# Altium PCB 00Key.PcbDoc (part 1 of 4)
Units mm, origin at the board's own origin, x right, y up, seen from the top; angles counter-clockwise.
Board outline 304.8 x 170.81 mm, 2 copper layers (F.Cu, B.Cu); 268 components, 236 nets, 1532 pads, 61 vias.
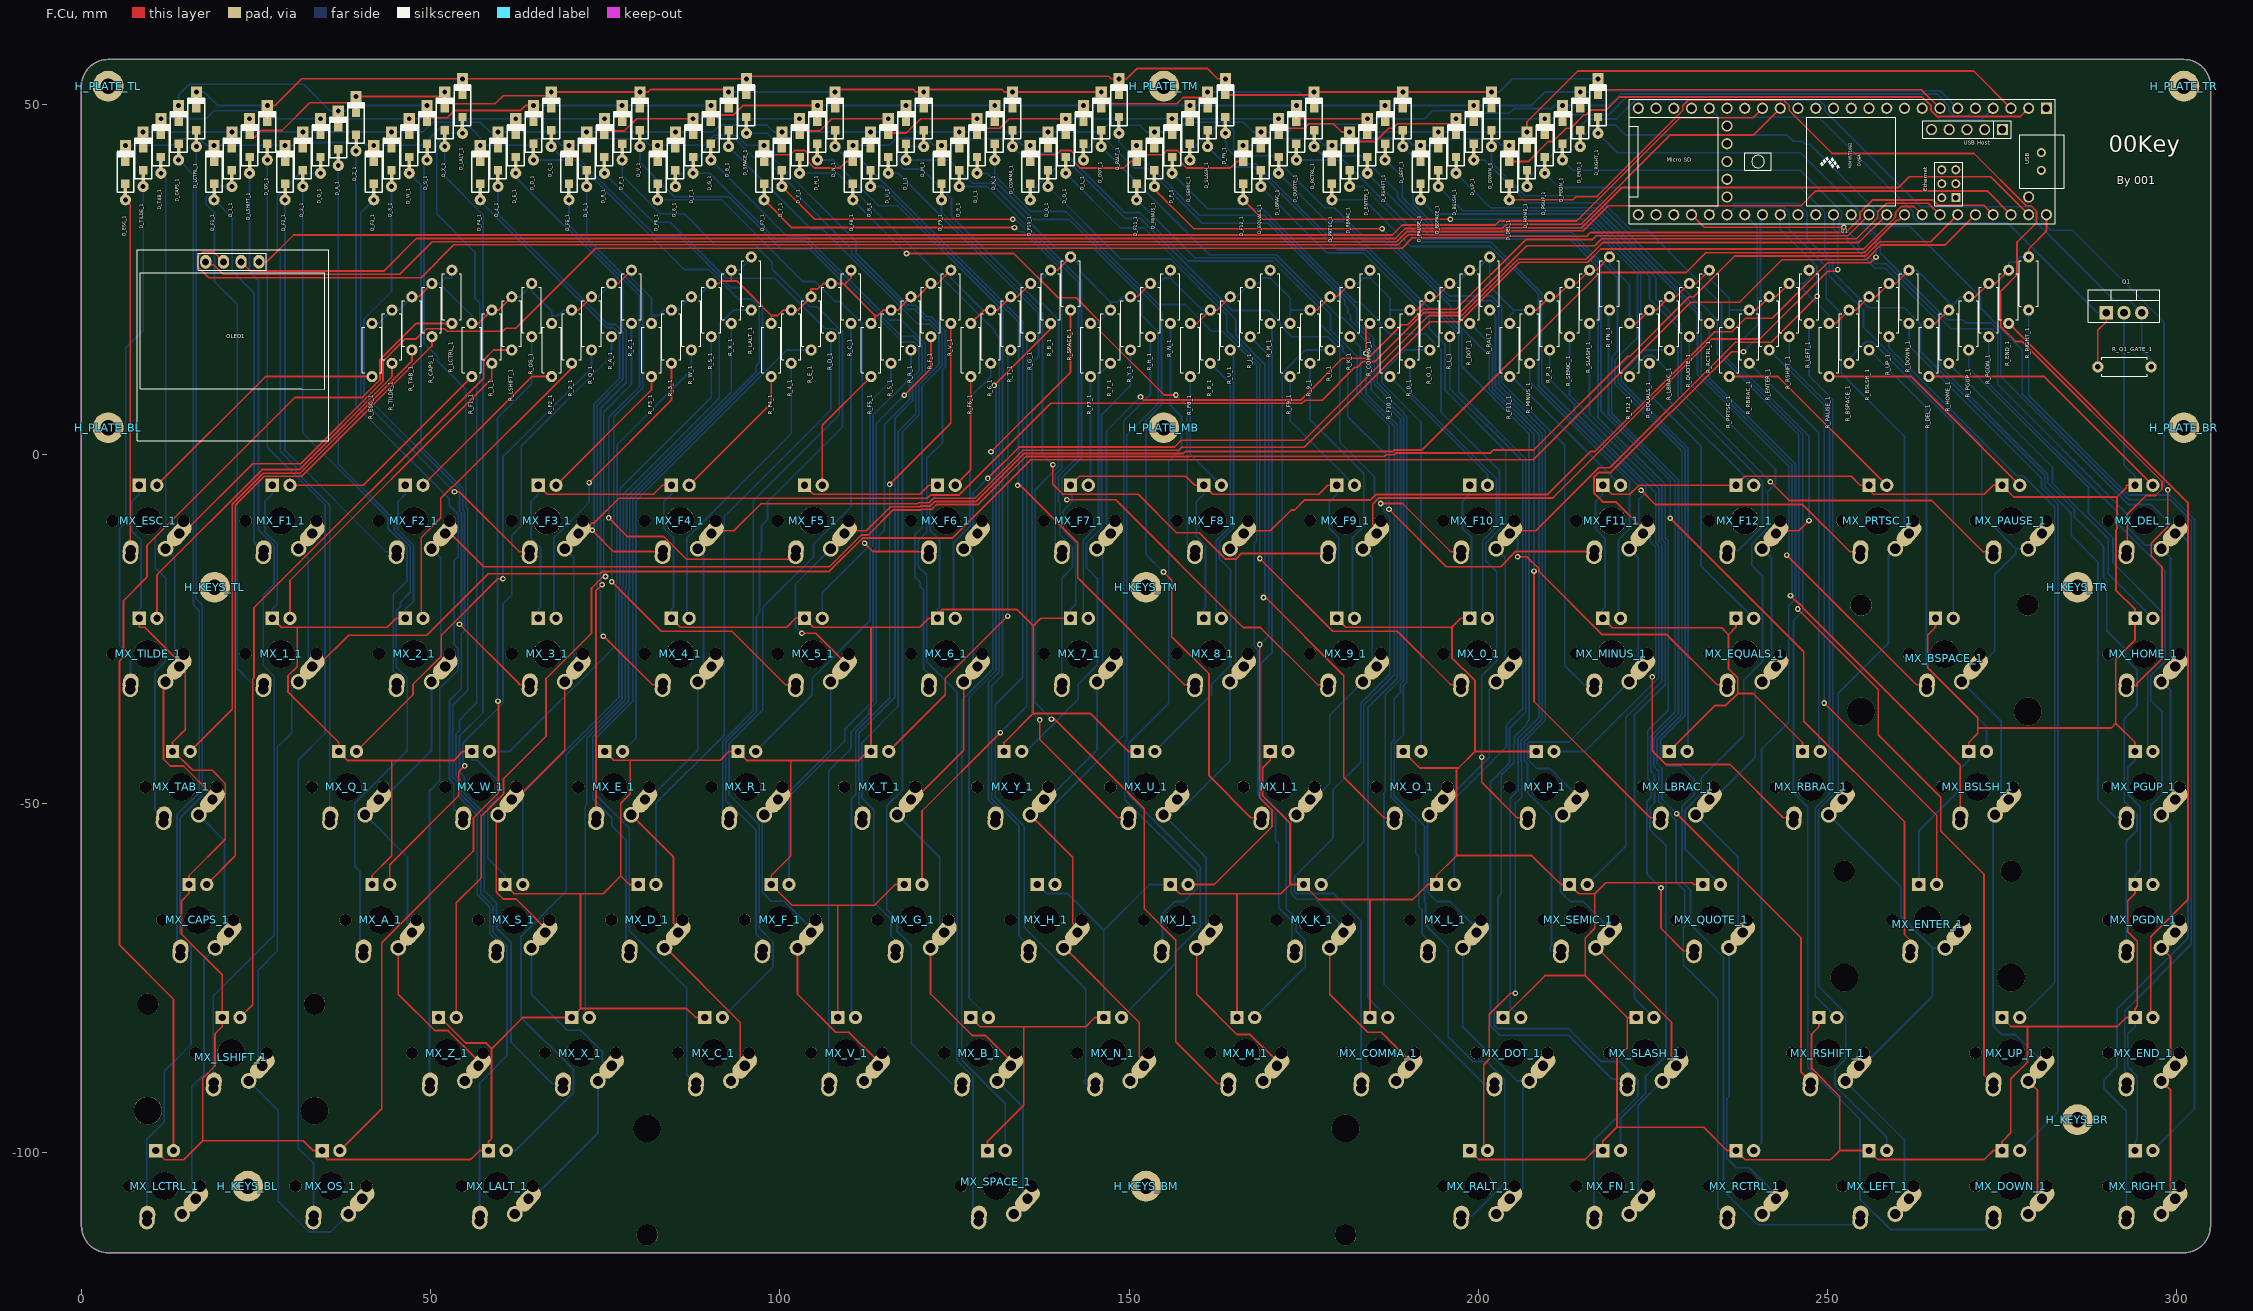
[diagram p0: F.Cu view]
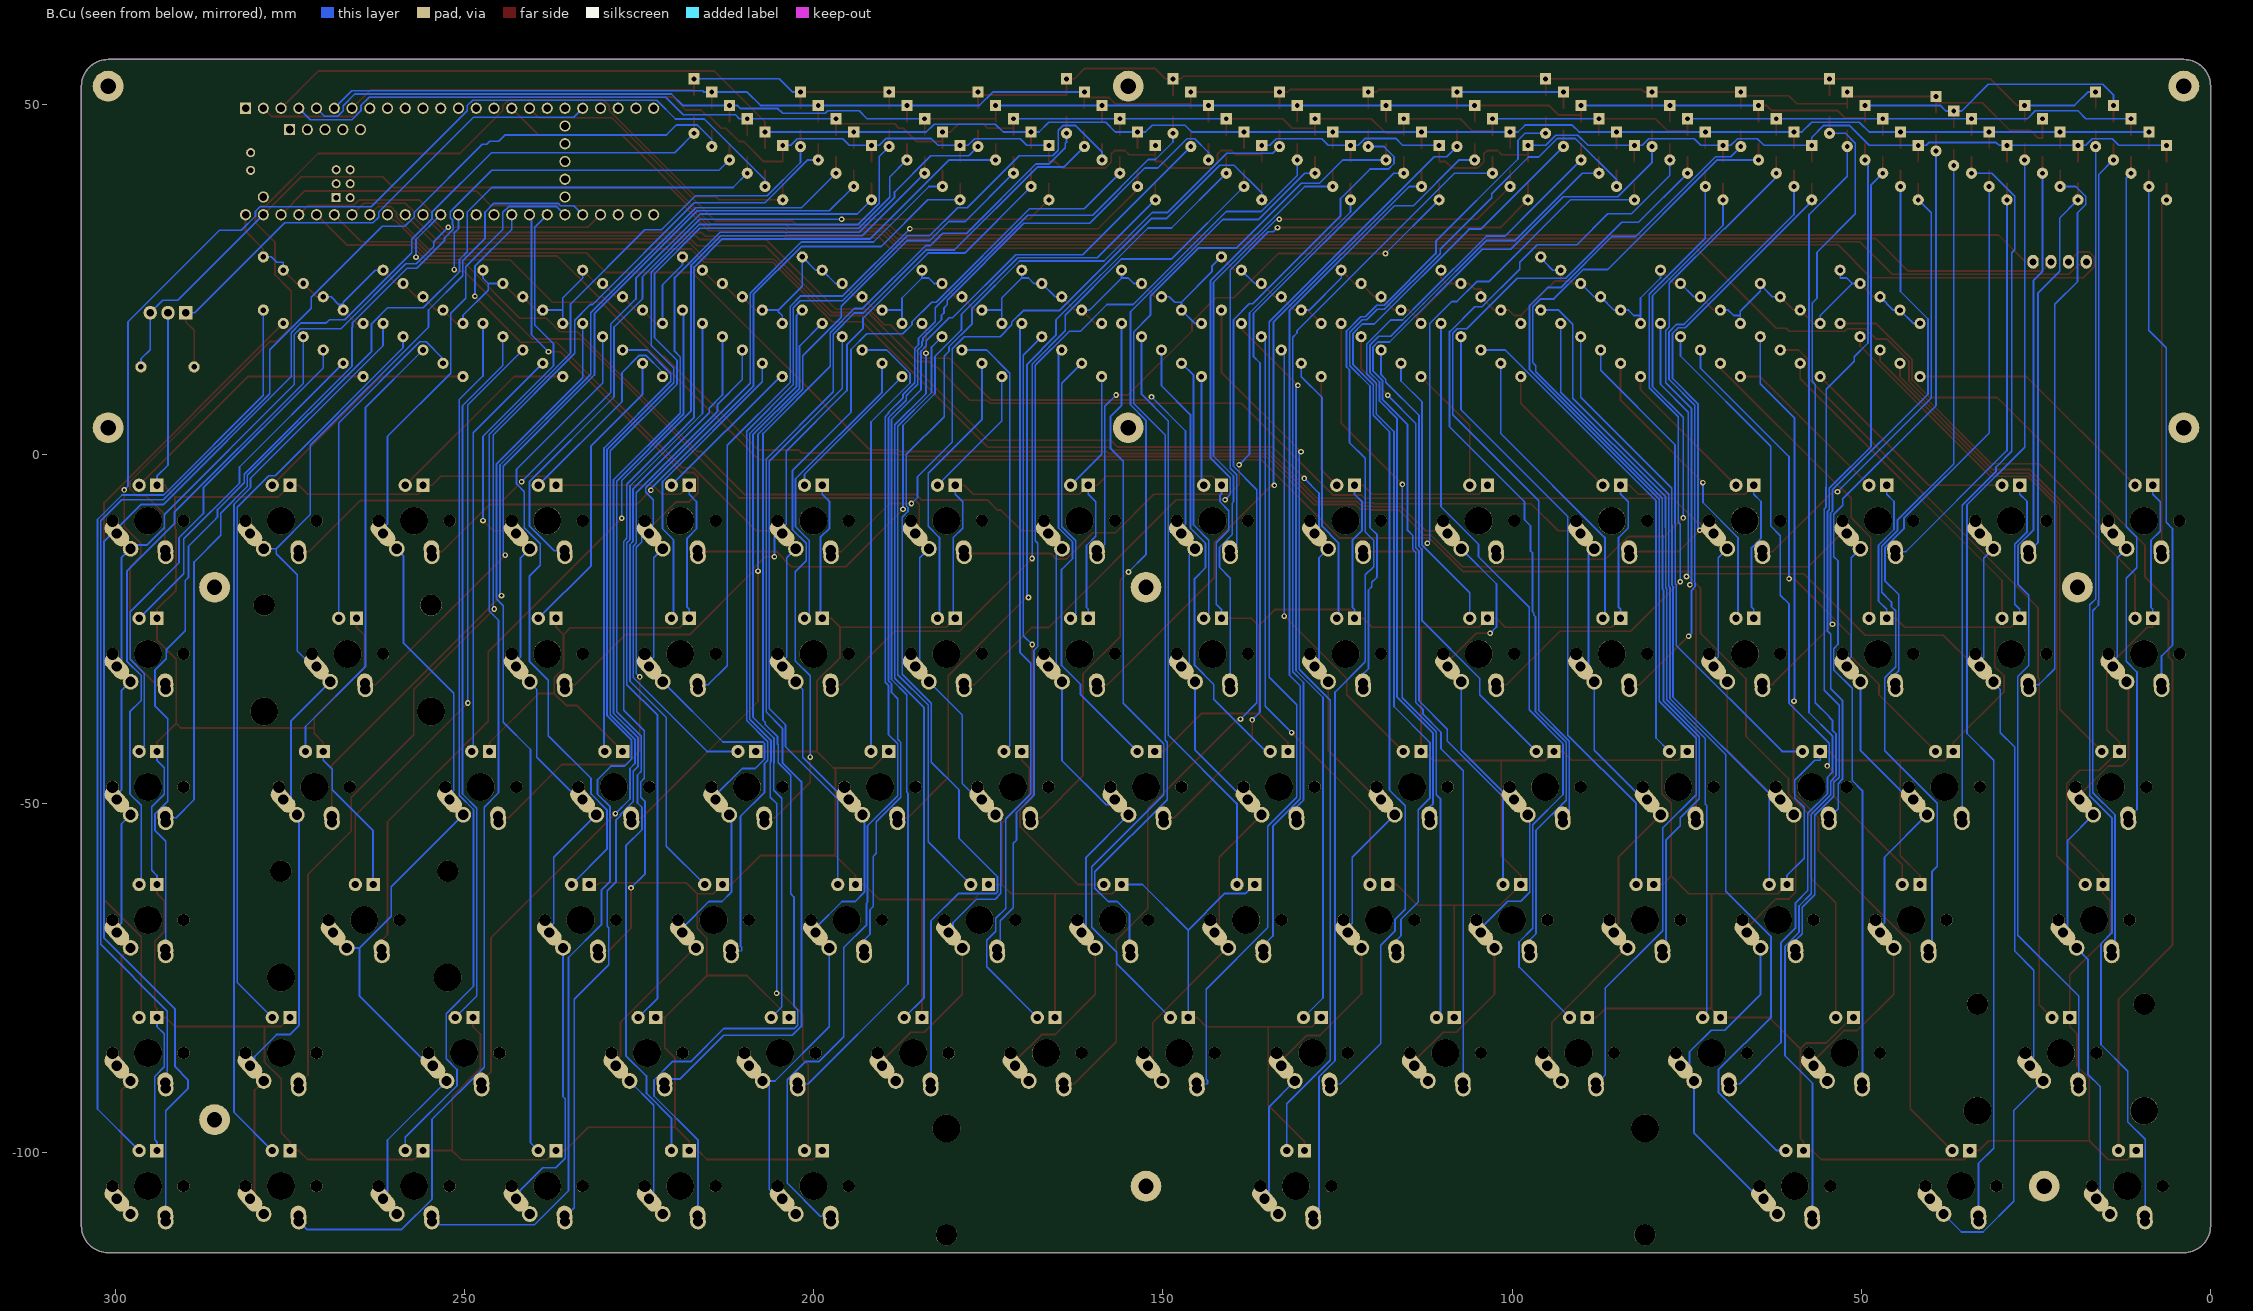
[diagram p1: B.Cu view, seen from below]

## Layer stack, top to bottom
F.Mask: solder mask 0.0102, Solder Resist, Dk 3.5
F.Cu: signal copper 0.0356
Dielectric 1: dielectric 0.32, FR-4, Dk 4.8
B.Cu: signal copper 0.0356
B.Mask: solder mask 0.0102, Solder Resist, Dk 3.5

## Board outline
0,52.705 0,-110.49 ccw(c3.81,-110.49) 3.81,-114.3 300.99,-114.3 ccw(c300.99,-110.49) 304.8,-110.49 304.8,52.705 ccw(c300.99,52.705) 3.81,56.515 ccw(c3.81,52.705) 0,52.705

## Design rules (kind name [scope] priority, off if disabled: settings)
Clearance "Clearence 0.2_NetClass" [InNetClass('Default')] p1: gap=0.2 ignorepadtopadclearanceinfootprint=FALSE
HoleSize "Hole Size (Default)" [All] p1: absolutevalues=TRUE maxlimit=10 minlimit=0.3 maxpercent=80.000 minpercent=20.000
MinimumSolderMaskSliver [All] p1: minsoldermaskwidth=0
PolygonConnect [All] p1: connectstyle=Direct reliefconductorwidth=0.254 reliefentries=4 polygonreliefangle="90 Angle" airgapwidth=0.254
RoutingVias [All] p1: holewidth=0.711 width=1.27 viastyle="Through Hole" minholewidth=0.711 minwidth=1.27 maxholewidth=0.711 maxwidth=1.27
SilkToSilkClearance [All] p1: silktosilkclearance=0
SilkToSolderMaskClearance [IsPad] p1: minsilkscreentomaskgap=0 clearancetoexposedcopper=TRUE
SolderMaskExpansion [All] p1: expansion=0.102 istentingtop=FALSE
Width [All] p1: maxlimit=10 minlimit=0.2 preferedwidth=0.25 minimp=50.000000 maximp=50.000000 favimp=50.000000
26 further rules are at their usual default settings.

## Classes and differential pairs
net class Default: 3.3V 5V col0 col1 col2 col3 col4 col5 col6 col7 col8 col9 col10 col11 col12 col13 col14 col15 GND LEDGND LEDPWM Net-(D_0_1-Pad2) Net-(D_1_1-Pad2) Net-(D_2_1-Pad2) Net-(D_3_1-Pad2) Net-(D_4_1-Pad2) Net-(D_5_1-Pad2) Net-(D_6_1-Pad2) Net-(D_7_1-Pad2) Net-(D_8_1-Pad2) Net-(D_9_1-Pad2) Net-(D_A_1-Pad2) Net-(D_B_1-Pad2) Net-(D_BSLSH_1-Pad2) Net-(D_BSPACE_1-Pad2) Net-(D_C_1-Pad2) Net-(D_CAPS_1-Pad2) Net-(D_COMMA_1-Pad2) Net-(D_D_1-Pad2) Net-(D_DEL_1-Pad2) Net-(D_DOT_1-Pad2) Net-(D_DOWN_1-Pad2) Net-(D_E_1-Pad2) Net-(D_END_1-Pad2) Net-(D_ENTER_1-Pad2) Net-(D_EQUALS_1-Pad2) Net-(D_ESC_1-Pad2) Net-(D_F1_1-Pad2) Net-(D_F2_1-Pad2) Net-(D_F3_1-Pad2) Net-(D_F4_1-Pad2) Net-(D_F5_1-Pad2) Net-(D_F6_1-Pad2) Net-(D_F7_1-Pad2) Net-(D_F8_1-Pad2) Net-(D_F9_1-Pad2) Net-(D_F10_1-Pad2) Net-(D_F11_1-Pad2) Net-(D_F12_1-Pad2) Net-(D_F_1-Pad2) Net-(D_FN_1-Pad2) Net-(D_G_1-Pad2) Net-(D_H_1-Pad2) Net-(D_HOME_1-Pad2) Net-(D_I_1-Pad2) Net-(D_J_1-Pad2) Net-(D_K_1-Pad2) Net-(D_L_1-Pad2) Net-(D_LALT_1-Pad2) Net-(D_LBRAC_1-Pad2) Net-(D_LCTRL_1-Pad2) Net-(D_LEFT_1-Pad2) Net-(D_LSHIFT_1-Pad2) Net-(D_M_1-Pad2) Net-(D_MINUS_1-Pad2) Net-(D_N_1-Pad2) Net-(D_O_1-Pad2) Net-(D_OS_1-Pad2) Net-(D_P_1-Pad2) Net-(D_PAUSE_1-Pad2) Net-(D_PGDN_1-Pad2) Net-(D_PGUP_1-Pad2) Net-(D_PRTSC_1-Pad2) Net-(D_Q_1-Pad2) Net-(D_QUOTE_1-Pad2) Net-(D_R_1-Pad2) Net-(D_RALT_1-Pad2) Net-(D_RBRAC_1-Pad2) Net-(D_RCTRL_1-Pad2) Net-(D_RIGHT_1-Pad2) Net-(D_RSHIFT_1-Pad2) Net-(D_S_1-Pad2) Net-(D_SEMIC_1-Pad2) Net-(D_SLASH_1-Pad2) Net-(D_SPACE_1-Pad2) Net-(D_T_1-Pad2) Net-(D_TAB_1-Pad2) Net-(D_TILDE_1-Pad2) Net-(D_U_1-Pad2) Net-(D_UP_1-Pad2) Net-(D_V_1-Pad2) Net-(D_W_1-Pad2) Net-(D_X_1-Pad2) Net-(D_Y_1-Pad2) Net-(D_Z_1-Pad2) Net-(MX_0_1-Pad3) Net-(MX_1_1-Pad3) Net-(MX_2_1-Pad3) Net-(MX_3_1-Pad3) Net-(MX_4_1-Pad3) Net-(MX_5_1-Pad3) Net-(MX_6_1-Pad3) Net-(MX_7_1-Pad3) Net-(MX_8_1-Pad3) Net-(MX_9_1-Pad3) Net-(MX_A_1-Pad3) Net-(MX_B_1-Pad3) Net-(MX_BSLSH_1-Pad3) Net-(MX_BSPACE_1-Pad3) Net-(MX_C_1-Pad3) Net-(MX_CAPS_1-Pad3) Net-(MX_COMMA_1-Pad3) Net-(MX_D_1-Pad3) Net-(MX_DEL_1-Pad3) Net-(MX_DOT_1-Pad3) Net-(MX_DOWN_1-Pad3) Net-(MX_E_1-Pad3) Net-(MX_END_1-Pad3) Net-(MX_ENTER_1-Pad3) Net-(MX_EQUALS_1-Pad3) Net-(MX_ESC_1-Pad3) Net-(MX_F1_1-Pad3) Net-(MX_F2_1-Pad3) Net-(MX_F3_1-Pad3) Net-(MX_F4_1-Pad3) Net-(MX_F5_1-Pad3) Net-(MX_F6_1-Pad3) Net-(MX_F7_1-Pad3) Net-(MX_F8_1-Pad3) Net-(MX_F9_1-Pad3) Net-(MX_F10_1-Pad3) Net-(MX_F11_1-Pad3) Net-(MX_F12_1-Pad3) Net-(MX_F_1-Pad3) Net-(MX_FN_1-Pad3) Net-(MX_G_1-Pad3) Net-(MX_H_1-Pad3) Net-(MX_HOME_1-Pad3) Net-(MX_I_1-Pad3) Net-(MX_J_1-Pad3) Net-(MX_K_1-Pad3) Net-(MX_L_1-Pad3) Net-(MX_LALT_1-Pad3) Net-(MX_LBRAC_1-Pad3) Net-(MX_LCTRL_1-Pad3) Net-(MX_LEFT_1-Pad3) Net-(MX_LSHIFT_1-Pad3) Net-(MX_M_1-Pad3) Net-(MX_MINUS_1-Pad3) Net-(MX_N_1-Pad3) Net-(MX_O_1-Pad3) Net-(MX_OS_1-Pad3) Net-(MX_P_1-Pad3) Net-(MX_PAUSE_1-Pad3) Net-(MX_PGDN_1-Pad3) Net-(MX_PGUP_1-Pad3) Net-(MX_PRTSC_1-Pad3) Net-(MX_Q_1-Pad3) Net-(MX_QUOTE_1-Pad3) Net-(MX_R_1-Pad3) Net-(MX_RALT_1-Pad3) Net-(MX_RBRAC_1-Pad3) Net-(MX_RCTRL_1-Pad3) Net-(MX_RIGHT_1-Pad3) Net-(MX_RSHIFT_1-Pad3) Net-(MX_S_1-Pad3) Net-(MX_SEMIC_1-Pad3) Net-(MX_SLASH_1-Pad3) Net-(MX_SPACE_1-Pad3) Net-(MX_T_1-Pad3) Net-(MX_TAB_1-Pad3) Net-(MX_TILDE_1-Pad3) Net-(MX_U_1-Pad3) Net-(MX_UP_1-Pad3) Net-(MX_V_1-Pad3) Net-(MX_W_1-Pad3) Net-(MX_X_1-Pad3) Net-(MX_Y_1-Pad3) Net-(MX_Z_1-Pad3) Net-(U1-Pad1) Net-(U1-Pad8) Net-(U1-Pad9) Net-(U1-Pad10) Net-(U1-Pad11) Net-(U1-Pad12) Net-(U1-Pad13) Net-(U1-Pad14) Net-(U1-Pad15) Net-(U1-Pad18) Net-(U1-Pad19) Net-(U1-Pad21) Net-(U1-Pad22) Net-(U1-Pad23) Net-(U1-Pad24) Net-(U1-Pad25) Net-(U1-Pad26) Net-(U1-Pad27) Net-(U1-Pad34) Net-(U1-Pad35) Net-(U1-Pad49) Net-(U1-Pad50) Net-(U1-Pad51) Net-(U1-Pad52) Net-(U1-Pad53) Net-(U1-Pad54) Net-(U1-Pad55) Net-(U1-Pad56) Net-(U1-Pad57) Net-(U1-Pad58) Net-(U1-Pad59) Net-(U1-Pad60) Net-(U1-Pad61) Net-(U1-Pad62) Net-(U1-Pad63) Net-(U1-Pad64) Net-(U1-Pad65) Net-(U1-Pad66) Net-(U1-Pad67) OLEDSCL OLEDSDA row0 row1 row2 row3 row4 row5

## Components (designator, comment, footprint, x,y, rotation, side; value= is the part's Value field where it differs from the comment)
D_0_1 "D" D_SOD123_axial 138.367,42.227 r270 top
D_1_1 "D" D_SOD123_axial 21.526,42.227 r270 top
D_2_1 "D" D_SOD123_axial 31.686,42.227 r270 top
D_3_1 "D" D_SOD123_axial 44.386,42.227 r270 top
D_4_1 "D" D_SOD123_axial 59.627,42.227 r270 top
D_5_1 "D" D_SOD123_axial 72.326,42.227 r270 top
D_6_1 "D" D_SOD123_axial 85.026,42.227 r270 top
D_7_1 "D" D_SOD123_axial 100.266,42.227 r270 top
D_8_1 "D" D_SOD123_axial 112.966,42.227 r270 top
D_9_1 "D" D_SOD123_axial 125.666,42.227 r270 top
D_A_1 "D" D_SOD123_axial 36.767,45.243 r270 top
D_B_1 "D" D_SOD123_axial 92.647,47.942 r270 top
D_BSLSH_1 "D" D_SOD123_axial 196.786,44.133 r270 top
D_BSPACE_1 "D" D_SOD123_axial 194.246,42.227 r270 top
D_C_1 "D" D_SOD123_axial 67.246,47.942 r270 top
D_CAPS_1 "D" D_SOD123_axial 13.906,46.038 r270 top
D_COMMA_1 "D" D_SOD123_axial 133.286,47.942 r270 top
D_D_1 "D" D_SOD123_axial 64.706,46.038 r270 top
D_DEL_1 "D" D_SOD123_axial 204.406,40.322 r270 top
D_DOT_1 "D" D_SOD123_axial 145.987,47.942 r270 top
D_DOWN_1 "D" D_SOD123_axial 201.867,47.942 r270 top
D_E_1 "D" D_SOD123_axial 62.166,44.133 r270 top
D_END_1 "D" D_SOD123_axial 214.566,47.942 r270 top
D_ENTER_1 "D" D_SOD123_axial 184.087,44.133 r270 top
D_EQUALS_1 "D" D_SOD123_axial 168.846,42.227 r270 top
D_ESC_1 "D" D_SOD123_axial 6.286,40.322 r270 top
D_F1_1 "D" D_SOD123_axial 18.986,40.322 r270 top
D_F2_1 "D" D_SOD123_axial 29.146,40.322 r270 top
D_F3_1 "D" D_SOD123_axial 41.846,40.322 r270 top
D_F4_1 "D" D_SOD123_axial 57.087,40.322 r270 top
D_F5_1 "D" D_SOD123_axial 69.787,40.322 r270 top
D_F6_1 "D" D_SOD123_axial 82.486,40.322 r270 top
D_F7_1 "D" D_SOD123_axial 97.727,40.322 r270 top
D_F8_1 "D" D_SOD123_axial 110.426,40.322 r270 top
D_F9_1 "D" D_SOD123_axial 123.126,40.322 r270 top
D_F10_1 "D" D_SOD123_axial 135.826,40.322 r270 top
D_F11_1 "D" D_SOD123_axial 151.066,40.322 r270 top
D_F12_1 "D" D_SOD123_axial 166.306,40.322 r270 top
D_F_1 "D" D_SOD123_axial 77.406,46.038 r270 top
D_FN_1 "D" D_SOD123_axial 163.766,49.847 r270 top
D_G_1 "D" D_SOD123_axial 90.106,46.038 r270 top
D_H_1 "D" D_SOD123_axial 105.346,46.038 r270 top
D_HOME_1 "D" D_SOD123_axial 206.946,42.227 r270 top
D_I_1 "D" D_SOD123_axial 128.207,44.133 r270 top
D_J_1 "D" D_SOD123_axial 118.046,46.038 r270 top
D_K_1 "D" D_SOD123_axial 130.746,46.038 r270 top
D_L_1 "D" D_SOD123_axial 143.446,46.038 r270 top
D_LALT_1 "D" D_SOD123_axial 54.546,49.847 r270 top
D_LBRAC_1 "D" D_SOD123_axial 171.386,44.133 r270 top
D_LCTRL_1 "D" D_SOD123_axial 16.447,47.942 r270 top
D_LEFT_1 "D" D_SOD123_axial 189.166,47.942 r270 top
D_LSHIFT_1 "D" D_SOD123_axial 24.066,44.133 r270 top
D_M_1 "D" D_SOD123_axial 120.587,47.942 r270 top
D_MINUS_1 "D" D_SOD123_axial 153.606,42.227 r270 top
D_N_1 "D" D_SOD123_axial 107.886,47.942 r270 top
D_O_1 "D" D_SOD123_axial 140.906,44.133 r270 top
D_OS_1 "D" D_SOD123_axial 26.607,46.038 r270 top
D_P_1 "D" D_SOD123_axial 156.147,44.133 r270 top
D_PAUSE_1 "D" D_SOD123_axial 191.707,40.322 r270 top
D_PGDN_1 "D" D_SOD123_axial 212.026,46.038 r270 top
D_PGUP_1 "D" D_SOD123_axial 209.486,44.133 r270 top
D_PRTSC_1 "D" D_SOD123_axial 179.006,40.322 r270 top
D_Q_1 "D" D_SOD123_axial 34.227,44.133 r270 top
D_QUOTE_1 "D" D_SOD123_axial 173.927,46.038 r270 top
D_R_1 "D" D_SOD123_axial 74.867,44.133 r270 top
D_RALT_1 "D" D_SOD123_axial 148.526,49.847 r270 top
D_RBRAC_1 "D" D_SOD123_axial 181.546,42.227 r270 top
D_RCTRL_1 "D" D_SOD123_axial 176.466,47.942 r270 top
D_RIGHT_1 "D" D_SOD123_axial 217.106,49.847 r270 top
D_RSHIFT_1 "D" D_SOD123_axial 186.626,46.038 r270 top
D_S_1 "D" D_SOD123_axial 49.466,46.038 r270 top
D_SEMIC_1 "D" D_SOD123_axial 158.686,46.038 r270 top
D_SLASH_1 "D" D_SOD123_axial 161.226,47.942 r270 top
D_SPACE_1 "D" D_SOD123_axial 95.186,49.847 r270 top
D_T_1 "D" D_SOD123_axial 87.566,44.133 r270 top
D_TAB_1 "D" D_SOD123_axial 11.367,44.133 r270 top
D_TILDE_1 "D" D_SOD123_axial 8.826,42.227 r270 top
D_U_1 "D" D_SOD123_axial 115.506,44.133 r270 top
D_UP_1 "D" D_SOD123_axial 199.326,46.038 r270 top
D_V_1 "D" D_SOD123_axial 79.947,47.942 r270 top
D_W_1 "D" D_SOD123_axial 46.926,44.133 r270 top
D_X_1 "D" D_SOD123_axial 52.006,47.942 r270 top
D_Y_1 "D" D_SOD123_axial 102.806,44.133 r270 top
D_Z_1 "D" D_SOD123_axial 39.306,47.307 r270 top
H_KEYS_BL "MountingHole_2.2mm_M2_Pad" MountingHole_2.2mm_M2_Pad 23.812,-104.774 r0 top
H_KEYS_BM "MountingHole_2.2mm_M2_Pad" MountingHole_2.2mm_M2_Pad 152.401,-104.774 r0 top
H_KEYS_BR "MountingHole_2.2mm_M2_Pad" MountingHole_2.2mm_M2_Pad 285.751,-95.251 r0 top
H_KEYS_TL "MountingHole_2.2mm_M2_Pad" MountingHole_2.2mm_M2_Pad 19.05,-19.051 r0 top
H_KEYS_TM "MountingHole_2.2mm_M2_Pad" MountingHole_2.2mm_M2_Pad 152.401,-19.051 r0 top
H_KEYS_TR "MountingHole_2.2mm_M2_Pad" MountingHole_2.2mm_M2_Pad 285.751,-19.051 r0 top
H_PLATE_BL "MountingHole_2.2mm_M2_Pad" MountingHole_2.2mm_M2_Pad 3.81,3.81 r0 top
H_PLATE_BR "MountingHole_2.2mm_M2_Pad" MountingHole_2.2mm_M2_Pad 300.991,3.81 r0 top
H_PLATE_MB "MountingHole_2.2mm_M2_Pad" MountingHole_2.2mm_M2_Pad 154.941,3.81 r0 top
H_PLATE_TL "MountingHole_2.2mm_M2_Pad" MountingHole_2.2mm_M2_Pad 3.81,52.705 r0 top
H_PLATE_TM "MountingHole_2.2mm_M2_Pad" MountingHole_2.2mm_M2_Pad 154.941,52.705 r0 top
H_PLATE_TR "MountingHole_2.2mm_M2_Pad" MountingHole_2.2mm_M2_Pad 300.991,52.705 r0 top
MX_0_1 "MX-LED" MX-1U 200.024,-28.574 r180 top
MX_1_1 "MX-LED" MX-1U 28.575,-28.574 r180 top
MX_2_1 "MX-LED" MX-1U 47.625,-28.574 r180 top
MX_3_1 "MX-LED" MX-1U 66.674,-28.574 r180 top
MX_4_1 "MX-LED" MX-1U 85.724,-28.574 r180 top
MX_5_1 "MX-LED" MX-1U 104.774,-28.574 r180 top
MX_6_1 "MX-LED" MX-1U 123.824,-28.574 r180 top
MX_7_1 "MX-LED" MX-1U 142.874,-28.574 r180 top
MX_8_1 "MX-LED" MX-1U 161.924,-28.574 r180 top
MX_9_1 "MX-LED" MX-1U 180.974,-28.574 r180 top
MX_A_1 "MX-LED" MX-1U 42.862,-66.674 r180 top
MX_B_1 "MX-LED" MX-1U 128.588,-85.724 r180 top
MX_BSLSH_1 "MX-LED" MX-1.5U 271.462,-47.624 r180 top
MX_BSPACE_1 "MX-LED" MX-2U-ReversedStabilizers 266.701,-28.574 r180 top
MX_C_1 "MX-LED" MX-1U 90.487,-85.724 r180 top
MX_CAPS_1 "MX-LED" MX-1.75U 16.669,-66.674 r180 top
MX_COMMA_1 "MX-LED" MX-1U 185.737,-85.724 r180 top
MX_D_1 "MX-LED" MX-1U 80.962,-66.674 r180 top
MX_DEL_1 "MX-LED" MX-1U 295.274,-9.524 r180 top
MX_DOT_1 "MX-LED" MX-1U 204.787,-85.724 r180 top
MX_DOWN_1 "MX-LED" MX-1U 276.224,-104.774 r180 top
MX_E_1 "MX-LED" MX-1U 76.201,-47.624 r180 top
MX_END_1 "MX-LED" MX-1U 295.274,-85.724 r180 top
MX_ENTER_1 "MX-LED" MX-2.25U-ReversedStabilizers 264.319,-66.674 r180 top
MX_EQUALS_1 "MX-LED" MX-1U 238.124,-28.574 r180 top
MX_ESC_1 "MX-LED" MX-1U 9.525,-9.524 r180 top
MX_F1_1 "MX-LED" MX-1U 28.575,-9.524 r180 top
MX_F2_1 "MX-LED" MX-1U 47.625,-9.524 r180 top
MX_F3_1 "MX-LED" MX-1U 66.674,-9.524 r180 top
MX_F4_1 "MX-LED" MX-1U 85.724,-9.524 r180 top
MX_F5_1 "MX-LED" MX-1U 104.774,-9.524 r180 top
MX_F6_1 "MX-LED" MX-1U 123.824,-9.524 r180 top
MX_F7_1 "MX-LED" MX-1U 142.874,-9.524 r180 top
MX_F8_1 "MX-LED" MX-1U 161.924,-9.524 r180 top
MX_F9_1 "MX-LED" MX-1U 180.974,-9.524 r180 top
MX_F10_1 "MX-LED" MX-1U 200.024,-9.524 r180 top
MX_F11_1 "MX-LED" MX-1U 219.074,-9.524 r180 top
MX_F12_1 "MX-LED" MX-1U 238.124,-9.524 r180 top
MX_F_1 "MX-LED" MX-1U 100.013,-66.674 r180 top
MX_FN_1 "MX-LED" MX-1U 219.074,-104.774 r180 top
MX_G_1 "MX-LED" MX-1U 119.062,-66.674 r180 top
MX_H_1 "MX-LED" MX-1U 138.112,-66.674 r180 top
MX_HOME_1 "MX-LED" MX-1U 295.274,-28.574 r180 top
MX_I_1 "MX-LED" MX-1U 171.451,-47.624 r180 top
MX_J_1 "MX-LED" MX-1U 157.162,-66.674 r180 top
MX_K_1 "MX-LED" MX-1U 176.213,-66.674 r180 top
MX_L_1 "MX-LED" MX-1U 195.262,-66.674 r180 top
MX_LALT_1 "MX-LED" MX-1.25U 59.531,-104.774 r180 top
MX_LBRAC_1 "MX-LED" MX-1U 228.601,-47.624 r180 top
MX_LCTRL_1 "MX-LED" MX-1.25U 11.906,-104.774 r180 top
MX_LEFT_1 "MX-LED" MX-1U 257.174,-104.774 r180 top
MX_LSHIFT_1 "MX-LED" MX-2.25U-ReversedStabilizers 21.431,-85.724 r180 top
MX_M_1 "MX-LED" MX-1U 166.688,-85.724 r180 top
MX_MINUS_1 "MX-LED" MX-1U 219.074,-28.574 r180 top
MX_N_1 "MX-LED" MX-1U 147.637,-85.724 r180 top
MX_O_1 "MX-LED" MX-1U 190.501,-47.624 r180 top
MX_OS_1 "MX-LED" MX-1.25U 35.719,-104.774 r180 top
MX_P_1 "MX-LED" MX-1U 209.551,-47.624 r180 top
MX_PAUSE_1 "MX-LED" MX-1U 276.224,-9.524 r180 top
MX_PGDN_1 "MX-LED" MX-1U 295.274,-66.674 r180 top
MX_PGUP_1 "MX-LED" MX-1U 295.274,-47.624 r180 top
MX_PRTSC_1 "MX-LED" MX-1U 257.174,-9.524 r180 top
MX_Q_1 "MX-LED" MX-1U 38.1,-47.624 r180 top
MX_QUOTE_1 "MX-LED" MX-1U 233.362,-66.674 r180 top
MX_R_1 "MX-LED" MX-1U 95.251,-47.624 r180 top
MX_RALT_1 "MX-LED" MX-1U 200.024,-104.774 r180 top
MX_RBRAC_1 "MX-LED" MX-1U 247.651,-47.624 r180 top
MX_RCTRL_1 "MX-LED" MX-1U 238.124,-104.774 r180 top
MX_RIGHT_1 "MX-LED" MX-1U 295.274,-104.774 r180 top
MX_RSHIFT_1 "MX-LED" MX-1.75U 250.031,-85.724 r180 top
MX_S_1 "MX-LED" MX-1U 61.912,-66.674 r180 top
MX_SEMIC_1 "MX-LED" MX-1U 214.312,-66.674 r180 top
MX_SLASH_1 "MX-LED" MX-1U 223.837,-85.724 r180 top
MX_SPACE_1 "MX-LED" MX-6.25U 130.969,-104.774 r180 top
MX_T_1 "MX-LED" MX-1U 114.301,-47.624 r180 top
MX_TAB_1 "MX-LED" MX-1.5U 14.287,-47.624 r180 top
MX_TILDE_1 "MX-LED" MX-1U 9.525,-28.574 r180 top
MX_U_1 "MX-LED" MX-1U 152.401,-47.624 r180 top
MX_UP_1 "MX-LED" MX-1U 276.224,-85.724 r180 top
MX_V_1 "MX-LED" MX-1U 109.537,-85.724 r180 top
MX_W_1 "MX-LED" MX-1U 57.15,-47.624 r180 top
MX_X_1 "MX-LED" MX-1U 71.438,-85.724 r180 top
MX_Y_1 "MX-LED" MX-1U 133.351,-47.624 r180 top
MX_Z_1 "MX-LED" MX-1U 52.387,-85.724 r180 top
OLED1 "SSD1306" 128x64OLED 21.399,16.954 r0 top
Q1 "IRLZ44N" TO-220-3_Vertical 289.877,20.256 r0 top
R_0_1 "470" R_Axial_DIN0207_L6.3mm_D2.5mm_P7.62mm_Horizontal 190.183,13.018 r90 top
R_1_1 "470" R_Axial_DIN0207_L6.3mm_D2.5mm_P7.62mm_Horizontal 58.737,13.018 r90 top
R_2_1 "470" R_Axial_DIN0207_L6.3mm_D2.5mm_P7.62mm_Horizontal 70.168,13.018 r90 top
R_3_1 "470" R_Axial_DIN0207_L6.3mm_D2.5mm_P7.62mm_Horizontal 84.454,13.018 r90 top
R_4_1 "470" R_Axial_DIN0207_L6.3mm_D2.5mm_P7.62mm_Horizontal 101.601,13.018 r90 top
R_5_1 "470" R_Axial_DIN0207_L6.3mm_D2.5mm_P7.62mm_Horizontal 115.887,13.018 r90 top
R_6_1 "470" R_Axial_DIN0207_L6.3mm_D2.5mm_P7.62mm_Horizontal 130.174,13.018 r90 top
R_7_1 "470" R_Axial_DIN0207_L6.3mm_D2.5mm_P7.62mm_Horizontal 147.321,13.018 r90 top
R_8_1 "470" R_Axial_DIN0207_L6.3mm_D2.5mm_P7.62mm_Horizontal 161.607,13.018 r90 top
R_9_1 "470" R_Axial_DIN0207_L6.3mm_D2.5mm_P7.62mm_Horizontal 175.894,13.018 r90 top
R_A_1 "470" R_Axial_DIN0207_L6.3mm_D2.5mm_P7.62mm_Horizontal 75.882,16.828 r90 top
R_B_1 "470" R_Axial_DIN0207_L6.3mm_D2.5mm_P7.62mm_Horizontal 138.748,18.732 r90 top
R_BSLSH_1 "470" R_Axial_DIN0207_L6.3mm_D2.5mm_P7.62mm_Horizontal 255.904,14.922 r90 top
R_BSPACE_1 "470" R_Axial_DIN0207_L6.3mm_D2.5mm_P7.62mm_Horizontal 253.047,13.018 r90 top
R_C_1 "470" R_Axial_DIN0207_L6.3mm_D2.5mm_P7.62mm_Horizontal 110.172,18.732 r90 top
R_CAPS_1 "470" R_Axial_DIN0207_L6.3mm_D2.5mm_P7.62mm_Horizontal 50.165,16.828 r90 top
R_COMMA_1 "470" R_Axial_DIN0207_L6.3mm_D2.5mm_P7.62mm_Horizontal 184.468,18.732 r90 top
R_D_1 "470" R_Axial_DIN0207_L6.3mm_D2.5mm_P7.62mm_Horizontal 107.314,16.828 r90 top
R_DEL_1 "470" R_Axial_DIN0207_L6.3mm_D2.5mm_P7.62mm_Horizontal 264.477,11.112 r90 top
R_DOT_1 "470" R_Axial_DIN0207_L6.3mm_D2.5mm_P7.62mm_Horizontal 198.754,18.732 r90 top
R_DOWN_1 "470" R_Axial_DIN0207_L6.3mm_D2.5mm_P7.62mm_Horizontal 261.621,18.732 r90 top
R_E_1 "470" R_Axial_DIN0207_L6.3mm_D2.5mm_P7.62mm_Horizontal 104.457,14.922 r90 top
R_END_1 "470" R_Axial_DIN0207_L6.3mm_D2.5mm_P7.62mm_Horizontal 275.907,18.732 r90 top
R_ENTER_1 "470" R_Axial_DIN0207_L6.3mm_D2.5mm_P7.62mm_Horizontal 241.617,14.922 r90 top
R_EQUALS_1 "470" R_Axial_DIN0207_L6.3mm_D2.5mm_P7.62mm_Horizontal 224.472,13.018 r90 top
R_ESC_1 "470" R_Axial_DIN0207_L6.3mm_D2.5mm_P7.62mm_Horizontal 41.593,11.112 r90 top
R_F1_1 "470" R_Axial_DIN0207_L6.3mm_D2.5mm_P7.62mm_Horizontal 55.88,11.112 r90 top
R_F2_1 "470" R_Axial_DIN0207_L6.3mm_D2.5mm_P7.62mm_Horizontal 67.311,11.112 r90 top
R_F3_1 "470" R_Axial_DIN0207_L6.3mm_D2.5mm_P7.62mm_Horizontal 81.597,11.112 r90 top
R_F4_1 "470" R_Axial_DIN0207_L6.3mm_D2.5mm_P7.62mm_Horizontal 98.742,11.112 r90 top
R_F5_1 "470" R_Axial_DIN0207_L6.3mm_D2.5mm_P7.62mm_Horizontal 113.031,11.112 r90 top
R_F6_1 "470" R_Axial_DIN0207_L6.3mm_D2.5mm_P7.62mm_Horizontal 127.317,11.112 r90 top
R_F7_1 "470" R_Axial_DIN0207_L6.3mm_D2.5mm_P7.62mm_Horizontal 144.463,11.112 r90 top
R_F8_1 "470" R_Axial_DIN0207_L6.3mm_D2.5mm_P7.62mm_Horizontal 158.751,11.112 r90 top
R_F9_1 "470" R_Axial_DIN0207_L6.3mm_D2.5mm_P7.62mm_Horizontal 173.037,11.112 r90 top
R_F10_1 "470" R_Axial_DIN0207_L6.3mm_D2.5mm_P7.62mm_Horizontal 187.324,11.112 r90 top
R_F11_1 "470" R_Axial_DIN0207_L6.3mm_D2.5mm_P7.62mm_Horizontal 204.471,11.112 r90 top
R_F12_1 "470" R_Axial_DIN0207_L6.3mm_D2.5mm_P7.62mm_Horizontal 221.614,11.112 r90 top
R_F_1 "470" R_Axial_DIN0207_L6.3mm_D2.5mm_P7.62mm_Horizontal 121.602,16.828 r90 top
R_FN_1 "470" R_Axial_DIN0207_L6.3mm_D2.5mm_P7.62mm_Horizontal 218.757,20.637 r90 top
R_G_1 "470" R_Axial_DIN0207_L6.3mm_D2.5mm_P7.62mm_Horizontal 135.891,16.828 r90 top
R_H_1 "470" R_Axial_DIN0207_L6.3mm_D2.5mm_P7.62mm_Horizontal 153.034,16.828 r90 top
R_HOME_1 "470" R_Axial_DIN0207_L6.3mm_D2.5mm_P7.62mm_Horizontal 267.334,13.018 r90 top
R_I_1 "470" R_Axial_DIN0207_L6.3mm_D2.5mm_P7.62mm_Horizontal 178.752,14.922 r90 top
R_J_1 "470" R_Axial_DIN0207_L6.3mm_D2.5mm_P7.62mm_Horizontal 167.322,16.828 r90 top
R_K_1 "470" R_Axial_DIN0207_L6.3mm_D2.5mm_P7.62mm_Horizontal 181.611,16.828 r90 top
R_L_1 "470" R_Axial_DIN0207_L6.3mm_D2.5mm_P7.62mm_Horizontal 195.897,16.828 r90 top
R_LALT_1 "470" R_Axial_DIN0207_L6.3mm_D2.5mm_P7.62mm_Horizontal 95.884,20.637 r90 top
R_LBRAC_1 "470" R_Axial_DIN0207_L6.3mm_D2.5mm_P7.62mm_Horizontal 227.331,14.922 r90 top
R_LCTRL_1 "470" R_Axial_DIN0207_L6.3mm_D2.5mm_P7.62mm_Horizontal 53.023,18.732 r90 top
R_LEFT_1 "470" R_Axial_DIN0207_L6.3mm_D2.5mm_P7.62mm_Horizontal 247.332,18.732 r90 top
R_LSHIFT_1 "470" R_Axial_DIN0207_L6.3mm_D2.5mm_P7.62mm_Horizontal 61.594,14.922 r90 top
R_M_1 "470" R_Axial_DIN0207_L6.3mm_D2.5mm_P7.62mm_Horizontal 170.181,18.732 r90 top
R_MINUS_1 "470" R_Axial_DIN0207_L6.3mm_D2.5mm_P7.62mm_Horizontal 207.327,13.018 r90 top
R_N_1 "470" R_Axial_DIN0207_L6.3mm_D2.5mm_P7.62mm_Horizontal 155.892,18.732 r90 top
R_O_1 "470" R_Axial_DIN0207_L6.3mm_D2.5mm_P7.62mm_Horizontal 193.041,14.922 r90 top
R_OS_1 "470" R_Axial_DIN0207_L6.3mm_D2.5mm_P7.62mm_Horizontal 64.453,16.828 r90 top
R_P_1 "470" R_Axial_DIN0207_L6.3mm_D2.5mm_P7.62mm_Horizontal 210.184,14.922 r90 top
R_PAUSE_1 "470" R_Axial_DIN0207_L6.3mm_D2.5mm_P7.62mm_Horizontal 250.191,11.112 r90 top
R_PGDN_1 "470" R_Axial_DIN0207_L6.3mm_D2.5mm_P7.62mm_Horizontal 273.051,16.828 r90 top
R_PGUP_1 "470" R_Axial_DIN0207_L6.3mm_D2.5mm_P7.62mm_Horizontal 270.192,14.922 r90 top
R_PRTSC_1 "470" R_Axial_DIN0207_L6.3mm_D2.5mm_P7.62mm_Horizontal 235.903,11.112 r90 top
R_Q1_GATE_1 "10K" R_Axial_DIN0207_L6.3mm_D2.5mm_P7.62mm_Horizontal 288.67,12.509 r0 top
R_Q_1 "470" R_Axial_DIN0207_L6.3mm_D2.5mm_P7.62mm_Horizontal 73.024,14.922 r90 top
R_QUOTE_1 "470" R_Axial_DIN0207_L6.3mm_D2.5mm_P7.62mm_Horizontal 230.188,16.828 r90 top
R_R_1 "470" R_Axial_DIN0207_L6.3mm_D2.5mm_P7.62mm_Horizontal 118.744,14.922 r90 top
R_RALT_1 "470" R_Axial_DIN0207_L6.3mm_D2.5mm_P7.62mm_Horizontal 201.612,20.637 r90 top
R_RBRAC_1 "470" R_Axial_DIN0207_L6.3mm_D2.5mm_P7.62mm_Horizontal 238.761,13.018 r90 top
R_RCTRL_1 "470" R_Axial_DIN0207_L6.3mm_D2.5mm_P7.62mm_Horizontal 233.044,18.732 r90 top
R_RIGHT_1 "470" R_Axial_DIN0207_L6.3mm_D2.5mm_P7.62mm_Horizontal 278.764,20.637 r90 top
R_RSHIFT_1 "470" R_Axial_DIN0207_L6.3mm_D2.5mm_P7.62mm_Horizontal 244.474,16.828 r90 top
R_S_1 "470" R_Axial_DIN0207_L6.3mm_D2.5mm_P7.62mm_Horizontal 90.171,16.828 r90 top
R_SEMIC_1 "470" R_Axial_DIN0207_L6.3mm_D2.5mm_P7.62mm_Horizontal 213.042,16.828 r90 top
R_SLASH_1 "470" R_Axial_DIN0207_L6.3mm_D2.5mm_P7.62mm_Horizontal 215.901,18.732 r90 top
R_SPACE_1 "470" R_Axial_DIN0207_L6.3mm_D2.5mm_P7.62mm_Horizontal 141.604,20.637 r90 top
R_T_1 "470" R_Axial_DIN0207_L6.3mm_D2.5mm_P7.62mm_Horizontal 133.032,14.922 r90 top
R_TAB_1 "470" R_Axial_DIN0207_L6.3mm_D2.5mm_P7.62mm_Horizontal 47.307,14.922 r90 top
R_TILDE_1 "470" R_Axial_DIN0207_L6.3mm_D2.5mm_P7.62mm_Horizontal 44.45,13.018 r90 top
R_U_1 "470" R_Axial_DIN0207_L6.3mm_D2.5mm_P7.62mm_Horizontal 164.464,14.922 r90 top
R_UP_1 "470" R_Axial_DIN0207_L6.3mm_D2.5mm_P7.62mm_Horizontal 258.762,16.828 r90 top
R_V_1 "470" R_Axial_DIN0207_L6.3mm_D2.5mm_P7.62mm_Horizontal 124.461,18.732 r90 top
R_W_1 "470" R_Axial_DIN0207_L6.3mm_D2.5mm_P7.62mm_Horizontal 87.312,14.922 r90 top
R_X_1 "470" R_Axial_DIN0207_L6.3mm_D2.5mm_P7.62mm_Horizontal 93.027,18.732 r90 top
R_Y_1 "470" R_Axial_DIN0207_L6.3mm_D2.5mm_P7.62mm_Horizontal 150.177,14.922 r90 top
R_Z_1 "470" R_Axial_DIN0207_L6.3mm_D2.5mm_P7.62mm_Horizontal 78.741,18.732 r90 top
U1 "Teensy4.1" Teensy41 252.094,41.91 r180 top

## Footprints (in the part's own frame and the unit in brackets; to place one, negate y for a bottom-side part, rotate by r counter-clockwise, add the part's x,y. Pads: shape width x height; smd on the part's side, far side on the other; paste and mask are expansions set on the pad)
128x64OLED [mm]
  rrect100% 1.6x2 hole 1 paste-2 mask+0.05: 1(-3.62,10.6) 2(-1.08,10.6) 3(1.46,10.6) 4(4,10.6)
  silkscreen extent -13.4,-15 14,12.3
D_SOD123_axial [mm]
  rect 1.6x1.6 hole 0.7 paste-1.6 mask+0.05: 1(-3.9,0)
  rect 2.5x0.5 smd paste-2.5 mask-2.5: 1(-2.7,0) 2(2.7,0)
  rect 1.2x1.2 smd mask+0.05: 1(-1.575,0) 2(1.575,0)
  round 1.6 hole 0.7 paste-1.6 mask+0.05: 2(3.9,0)
  silkscreen extent -3.03,-1.2 2.8,1.2
MountingHole_2.2mm_M2_Pad [mm]
  round 4.4 hole 2.2 paste-4.4 mask+0.05: 1(0,0)
MX-1.5U [mm]
  rrect100% 4.212x2.25 hole 1.47 rot 48.1 paste-4.212 mask-4.212: 1(-4.465,1.81)
  round 2.25 hole 1.47 paste-2.25 mask-2.25: 1(-2.5,4) 2(2.54,5.08)
  rrect100% 2.831x2.25 hole 1.47 rot 86.05 paste-2.831 mask-2.831: 2(2.48,4.21)
  round 1.905 hole 1.04 paste-1.905 mask-1.905: 3(-1.27,-5.08)
  rect 1.905x1.905 hole 1.04 paste-1.905 mask-1.905: 4(1.27,-5.08)
  round 1.75 hole 1.75 paste-1.75 mask+0.05: Un1(5.08,0) Un2(-5.08,0)
  round 3.988 hole 3.988 paste-3.988 mask+0.05: Un3(0,0)
MX-1.25U [mm]
  rrect100% 4.212x2.25 hole 1.47 rot 48.1 paste-4.212 mask-4.212: 1(-4.465,1.81)
  round 2.25 hole 1.47 paste-2.25 mask-2.25: 1(-2.5,4) 2(2.54,5.08)
  rrect100% 2.831x2.25 hole 1.47 rot 86.05 paste-2.831 mask-2.831: 2(2.48,4.21)
  round 1.905 hole 1.04 paste-1.905 mask-1.905: 3(-1.27,-5.08)
  rect 1.905x1.905 hole 1.04 paste-1.905 mask-1.905: 4(1.27,-5.08)
  round 1.75 hole 1.75 paste-1.75 mask+0.05: Un1(5.08,0) Un2(-5.08,0)
  round 3.988 hole 3.988 paste-3.988 mask+0.05: Un3(0,0)
MX-1.75U [mm]
  rrect100% 4.212x2.25 hole 1.47 rot 48.1 paste-4.212 mask-4.212: 1(-4.465,1.81)
  round 2.25 hole 1.47 paste-2.25 mask-2.25: 1(-2.5,4) 2(2.54,5.08)
  rrect100% 2.831x2.25 hole 1.47 rot 86.05 paste-2.831 mask-2.831: 2(2.48,4.21)
  round 1.905 hole 1.04 paste-1.905 mask-1.905: 3(-1.27,-5.08)
  rect 1.905x1.905 hole 1.04 paste-1.905 mask-1.905: 4(1.27,-5.08)
  round 1.75 hole 1.75 paste-1.75 mask+0.05: Un1(5.08,0) Un2(-5.08,0)
  round 3.988 hole 3.988 paste-3.988 mask+0.05: Un3(0,0)
MX-1U [mm]
  rrect100% 4.212x2.25 hole 1.47 rot 48.1 paste-4.212 mask-4.212: 1(-4.465,1.81)
  round 2.25 hole 1.47 paste-2.25 mask-2.25: 1(-2.5,4) 2(2.54,5.08)
  rrect100% 2.831x2.25 hole 1.47 rot 86.05 paste-2.831 mask-2.831: 2(2.48,4.21)
  round 1.905 hole 1.04 paste-1.905 mask-1.905: 3(-1.27,-5.08)
  rect 1.905x1.905 hole 1.04 paste-1.905 mask-1.905: 4(1.27,-5.08)
  round 1.75 hole 1.75 paste-1.75 mask+0.05: Un1(5.08,0) Un2(-5.08,0)
  round 3.988 hole 3.988 paste-3.988 mask+0.05: Un3(0,0)
MX-2.25U-ReversedStabilizers [mm]
  rrect100% 4.212x2.25 hole 1.47 rot 48.1 paste-4.212 mask-4.212: 1(-4.465,1.81)
  round 2.25 hole 1.47 paste-2.25 mask-2.25: 1(-2.5,4) 2(2.54,5.08)
  rrect100% 2.831x2.25 hole 1.47 rot 86.05 paste-2.831 mask-2.831: 2(2.48,4.21)
  round 1.905 hole 1.04 paste-1.905 mask-1.905: 3(-1.27,-5.08)
  rect 1.905x1.905 hole 1.04 paste-1.905 mask-1.905: 4(1.27,-5.08)
  round 3.988 hole 3.988 paste-3.988 mask+0.05: Un1(11.938,8.255) Un2(-11.938,8.255) Un7(0,0)
  round 3.048 hole 3.048 paste-3.048 mask+0.05: Un3(11.938,-6.985) Un4(-11.938,-6.985)
  round 1.75 hole 1.75 paste-1.75 mask+0.05: Un5(5.08,0) Un6(-5.08,0)
MX-2U-ReversedStabilizers [mm]
  rrect100% 4.212x2.25 hole 1.47 rot 48.1 paste-4.212 mask-4.212: 1(-4.465,1.81)
  round 2.25 hole 1.47 paste-2.25 mask-2.25: 1(-2.5,4) 2(2.54,5.08)
  rrect100% 2.831x2.25 hole 1.47 rot 86.05 paste-2.831 mask-2.831: 2(2.48,4.21)
  round 1.905 hole 1.04 paste-1.905 mask-1.905: 3(-1.27,-5.08)
  rect 1.905x1.905 hole 1.04 paste-1.905 mask-1.905: 4(1.27,-5.08)
  round 3.988 hole 3.988 paste-3.988 mask+0.05: Un1(11.938,8.255) Un2(-11.938,8.255) Un7(0,0)
  round 3.048 hole 3.048 paste-3.048 mask+0.05: Un3(11.938,-6.985) Un4(-11.938,-6.985)
  round 1.75 hole 1.75 paste-1.75 mask+0.05: Un5(5.08,0) Un6(-5.08,0)
MX-6.25U [mm]
  rrect100% 4.212x2.25 hole 1.47 rot 48.1 paste-4.212 mask-4.212: 1(-4.465,1.81)
  round 2.25 hole 1.47 paste-2.25 mask-2.25: 1(-2.5,4) 2(2.54,5.08)
  rrect100% 2.831x2.25 hole 1.47 rot 86.05 paste-2.831 mask-2.831: 2(2.48,4.21)
  round 1.905 hole 1.04 paste-1.905 mask-1.905: 3(-1.27,-5.08)
  rect 1.905x1.905 hole 1.04 paste-1.905 mask-1.905: 4(1.27,-5.08)
  round 3.988 hole 3.988 paste-3.988 mask+0.05: Un1(50,-8.255) Un2(-50,-8.255) Un7(0,0)
  round 3.048 hole 3.048 paste-3.048 mask+0.05: Un3(50,6.985) Un4(-50,6.985)
  round 1.75 hole 1.75 paste-1.75 mask+0.05: Un5(5.08,0) Un6(-5.08,0)
R_Axial_DIN0207_L6.3mm_D2.5mm_P7.62mm_Horizontal [mm]
  round 1.6 hole 0.8 paste-1.6 mask+0.05: 1(0,0)
  rrect100% 1.6x1.6 hole 0.8 paste-1.6 mask+0.05: 2(7.62,0)
  silkscreen extent 0.54,-1.37 7.08,1.37
Teensy41 [mm]
  rect 1.6x1.6 hole 1.1 paste-1.6 mask+0.05: 1(-29.21,-7.62) 55(-22.911,-4.569)
  round 1.6 hole 1.1 paste-1.6 mask+0.05: 2(-26.67,-7.62) 3(-24.13,-7.62) 4(-21.59,-7.62) 5(-19.05,-7.62) 6(-16.51,-7.62) 7(-13.97,-7.62) 8(-11.43,-7.62) 9(-8.89,-7.62) 10(-6.35,-7.62) 11(-3.81,-7.62) 12(-1.27,-7.62) 13(1.27,-7.62) 14(3.81,-7.62) 15(6.35,-7.62) 16(8.89,-7.62) 17(11.43,-7.62) 18(13.97,-7.62) 19(16.51,-7.62) 20(19.05,-7.62) 21(21.59,-7.62) 22(24.13,-7.62) 23(26.67,-7.62) 24(29.21,-7.62) 25(29.21,7.62) 26(26.67,7.62) 27(24.13,7.62) 28(21.59,7.62) 29(19.05,7.62) 30(16.51,7.62) 31(13.97,7.62) 32(11.43,7.62) 33(8.89,7.62) 34(6.35,7.62) 35(3.81,7.62) 36(1.27,7.62) 37(-1.27,7.62) 38(-3.81,7.62) 39(-6.35,7.62) 40(-8.89,7.62) 41(-11.43,7.62) 42(-13.97,7.62) 43(-16.51,7.62) 44(-19.05,7.62) 45(-21.59,7.62) 46(-24.13,7.62) 47(-26.67,7.62) 48(-29.21,7.62) 49(-26.67,5.08) 50(16.51,-5.08) 51(16.51,-2.54) 52(16.51,0) 53(16.51,2.54) 54(16.51,5.08) 56(-20.371,-4.569) 57(-17.831,-4.569) 58(-15.291,-4.569) 59(-12.751,-4.569)
  rect 1.3x1.3 hole 0.8 paste-1.3 mask+0.05: 60(-16.24,5.182)
  round 1.3 hole 0.8 paste-1.3 mask+0.05: 61(-16.24,3.182) 62(-16.24,1.182) 63(-14.24,1.182) 64(-14.24,3.182) 65(-14.24,5.182) 66(-28.48,-1.27) 67(-28.48,1.27)
  silkscreen extent -31.75,-8.89 30.48,8.89
TO-220-3_Vertical [mm]
  rect 1.905x2 hole 1.1 paste-2 mask+0.05: 1(0,0)
  rrect100% 1.905x2 hole 1.1 paste-2 mask+0.05: 2(2.54,0) 3(5.08,0)
  silkscreen extent -2.58,-1.37 7.66,3.27

## Part data
D_0_1 D_1_1 D_2_1 D_3_1 D_4_1 D_5_1 D_6_1 D_7_1 D_8_1 D_9_1 D_A_1 D_B_1 D_BSLSH_1 D_BSPACE_1 D_C_1 D_CAPS_1 D_COMMA_1 D_D_1 D_DEL_1 D_DOT_1 D_DOWN_1 D_E_1 D_END_1 D_ENTER_1 D_EQUALS_1 D_ESC_1 D_F1_1 D_F2_1 D_F3_1 D_F4_1 D_F5_1 D_F6_1 D_F7_1 D_F8_1 D_F9_1 D_F10_1 D_F11_1 D_F12_1 D_F_1 D_FN_1 D_G_1 D_H_1 D_HOME_1 D_I_1 D_J_1 D_K_1 D_L_1 D_LALT_1 D_LBRAC_1 D_LCTRL_1 D_LEFT_1 D_LSHIFT_1 D_M_1 D_MINUS_1 D_N_1 D_O_1 D_OS_1 D_P_1 D_PAUSE_1 D_PGDN_1 D_PGUP_1 D_PRTSC_1 D_Q_1 D_QUOTE_1 D_R_1 D_RALT_1 D_RBRAC_1 D_RCTRL_1 D_RIGHT_1 D_RSHIFT_1 D_S_1 D_SEMIC_1 D_SLASH_1 D_SPACE_1 D_T_1 D_TAB_1 D_TILDE_1 D_U_1 D_UP_1 D_V_1 D_W_1 D_X_1 D_Y_1 D_Z_1: library part D_SOD123_axial
H_KEYS_BL H_KEYS_BM H_KEYS_BR H_KEYS_TL H_KEYS_TM H_KEYS_TR H_PLATE_BL H_PLATE_BR H_PLATE_MB H_PLATE_TL H_PLATE_TM H_PLATE_TR: "Mounting Hole 2.2mm, M2"
MX_0_1 MX_1_1 MX_2_1 MX_3_1 MX_4_1 MX_5_1 MX_6_1 MX_7_1 MX_8_1 MX_9_1 MX_A_1 MX_B_1 MX_C_1 MX_COMMA_1 MX_D_1 MX_DEL_1 MX_DOT_1 MX_DOWN_1 MX_E_1 MX_END_1 MX_EQUALS_1 MX_ESC_1 MX_F1_1 MX_F2_1 MX_F3_1 MX_F4_1 MX_F5_1 MX_F6_1 MX_F7_1 MX_F8_1 MX_F9_1 MX_F10_1 MX_F11_1 MX_F12_1 MX_F_1 MX_FN_1 MX_G_1 MX_H_1 MX_HOME_1 MX_I_1 MX_J_1 MX_K_1 MX_L_1 MX_LBRAC_1 MX_LEFT_1 MX_M_1 MX_MINUS_1 MX_N_1 MX_O_1 MX_P_1 MX_PAUSE_1 MX_PGDN_1 MX_PGUP_1 MX_PRTSC_1 MX_Q_1 MX_QUOTE_1 MX_R_1 MX_RALT_1 MX_RBRAC_1 MX_RCTRL_1 MX_RIGHT_1 MX_S_1 MX_SEMIC_1 MX_SLASH_1 MX_T_1 MX_TILDE_1 MX_U_1 MX_UP_1 MX_V_1 MX_W_1 MX_X_1 MX_Y_1 MX_Z_1: library part MX-1U
MX_BSLSH_1 MX_TAB_1: library part MX-1.5U
MX_BSPACE_1: library part MX-2U-ReversedStabilizers
MX_CAPS_1 MX_RSHIFT_1: library part MX-1.75U
MX_ENTER_1 MX_LSHIFT_1: library part MX-2.25U-ReversedStabilizers
MX_LALT_1 MX_LCTRL_1 MX_OS_1: library part MX-1.25U
MX_SPACE_1: library part MX-6.25U
OLED1: library part 128x64OLED
Q1: library part TO-220-3_Vertical, "TO-220-3, Vertical, RM 2.54mm, see https://www.vishay.com/docs/66542/to-220-1.pdf"
R_0_1 R_1_1 R_2_1 R_3_1 R_4_1 R_5_1 R_6_1 R_7_1 R_8_1 R_9_1 R_A_1 R_B_1 R_BSLSH_1 R_BSPACE_1 R_C_1 R_CAPS_1 R_COMMA_1 R_D_1 R_DEL_1 R_DOT_1 R_DOWN_1 R_E_1 R_END_1 R_ENTER_1 R_EQUALS_1 R_ESC_1 R_F1_1 R_F2_1 R_F3_1 R_F4_1 R_F5_1 R_F6_1 R_F7_1 R_F8_1 R_F9_1 R_F10_1 R_F11_1 R_F12_1 R_F_1 R_FN_1 R_G_1 R_H_1 R_HOME_1 R_I_1 R_J_1 R_K_1 R_L_1 R_LALT_1 R_LBRAC_1 R_LCTRL_1 R_LEFT_1 R_LSHIFT_1 R_M_1 R_MINUS_1 R_N_1 R_O_1 R_OS_1 R_P_1 R_PAUSE_1 R_PGDN_1 R_PGUP_1 R_PRTSC_1 R_Q1_GATE_1 R_Q_1 R_QUOTE_1 R_R_1 R_RALT_1 R_RBRAC_1 R_RCTRL_1 R_RIGHT_1 R_RSHIFT_1 R_S_1 R_SEMIC_1 R_SLASH_1 R_SPACE_1 R_T_1 R_TAB_1 R_TILDE_1 R_U_1 R_UP_1 R_V_1 R_W_1 R_X_1 R_Y_1 R_Z_1: library part R_Axial_DIN0207_L6.3mm_D2.5mm_P7.62mm_Horizontal, "Resistor, Axial_DIN0207 series, Axial, Horizontal, pin pitch=7.62mm, 0.25W = 1/4W, length*diameter=6.3*2.5mm^2, http://cdn-reichelt.de/documents/datenblatt/B400/1_4W%23YAG.pdf"
U1: library part Teensy41

## Via types
v1: diameter 0.8, hole 0.4, F.Cu to B.Cu, tented both sides, 61 vias

## Nets (pads, with @x,y where several pads share a name; then routed paths per layer and width w, separated by ;. In a path a pad name is that pad's centre, name@x,y a point inside that pad or via, vN(x,y) a via of type N, cw(c..) or ccw(c..) an arc to the next point about the centre after c; other vN are vias at no path point)
3.3V: OLED1.2 U1.46 | length 272.7
  F.Cu w0.25: OLED1.2@20.319,27.554 18.922,28.952 17.349,28.952 16.639,28.241 16.639,26.868 18.223,25.285 48.615,25.285 53.314,29.983 188.482,29.983 189.929,31.43 203.796,31.43 204.359,31.993 214.997,31.993 218.564,35.56 246.167,35.56 248.31,37.704 272.811,37.704 U1.46@276.224,34.29